# Altium PCB PCB_sendClient.pcbdoc
Units mil, origin at the board's own origin, x right, y up, seen from the top; angles counter-clockwise.
Board outline 3434.79 x 2325.56 mil, 2 copper layers (Top Layer, Bottom Layer); 28 components, 45 nets, 107 pads, 12 vias.
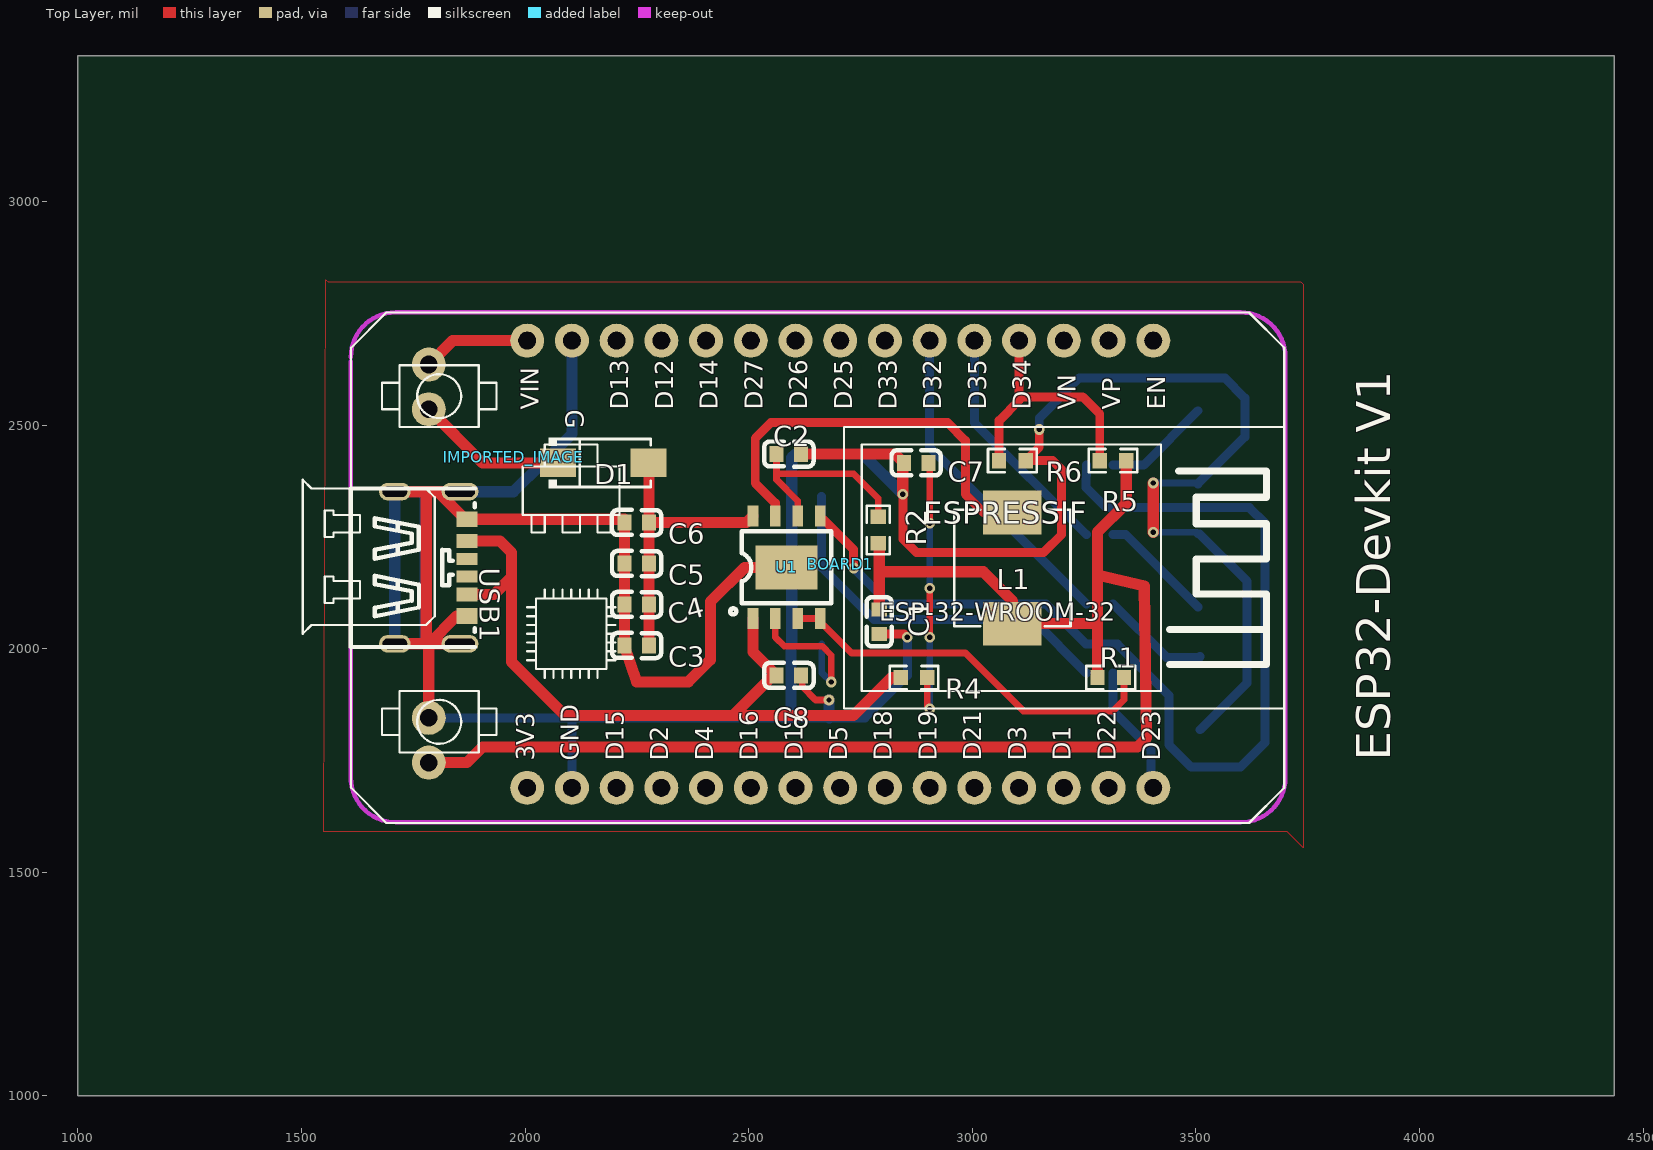
[diagram p0: Top Layer view]
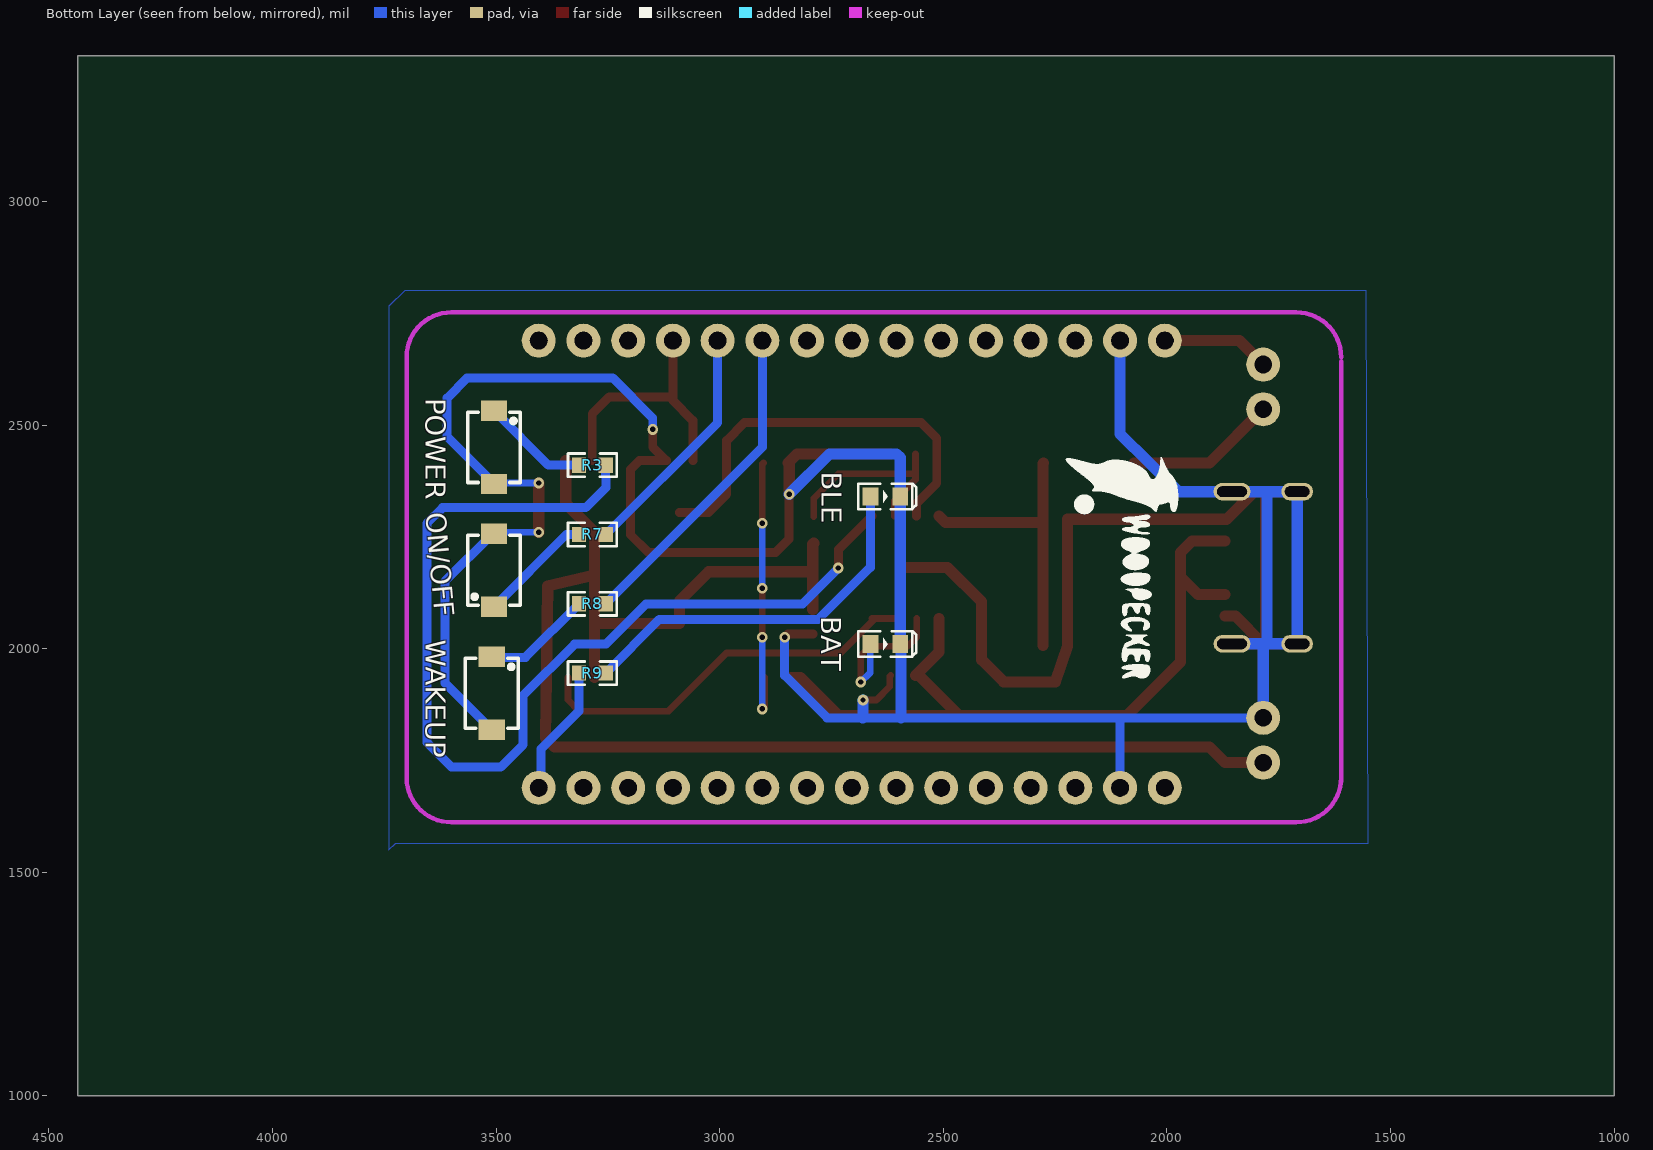
[diagram p1: Bottom Layer view, seen from below]

## Layer stack, top to bottom
Top Layer: signal copper (thickness not stored)
Dielectric: dielectric 12.6, FR-4, Dk 4.8
Bottom Layer: signal copper (thickness not stored)

## Board outline
4434.79,1000 1000,1000 1000,3325.56 4434.79,3325.56

## Components (designator, comment, footprint, x,y, rotation, side; value= is the part's Value field where it differs from the comment)
BAT "LED-0603_R" LED0603_RED 2629.47,2010.56 r0 bottom
BLE "LED-0603_R" LED0603_RED 2629.47,2340.56 r0 bottom
BOARD1 "ESP32DEVKITV1" ESP32-DEVKITV1 2004.47,1689.1 r0 top
C1 "22μF" C0603 2791.63,2060.56 r90 top
C2 "22μF" C0603 2589.47,2435.56 r180 top
C3 "22μF" C0603 2249.47,2007.22 r0 top
C4 "22μF" C0603 2249.47,2098.89 r0 top
C5 "22μF" C0603 2249.47,2190.56 r0 top
C6 "22μF" C0603 2249.47,2282.22 r0 top
C7 "10μF" C0603 2874.47,2415.56 r0 top
C8 "10μF" C0603 2589.47,1940.56 r180 top
D1 "SS14" SMA_L4.4-W2.8-LS5.4-RD 2174.47,2415.56 r0 top
IMPORTED_IMAGE "IMPORTED_IMAGE" IMPORTED_IMAGE 1974.78,2428.51 r0 top
L1 "1uH" IND-SMD_L7.1-W6.6 3089.47,2180.56 r90 top
ON/OFF "BUTTON_FLASH" SMT_SW_PTS_820 3504.47,2175.56 r270 bottom
POWER "BUTTON_FLASH" SMT_SW_PTS_820 3504.47,2450.56 r90 bottom
R1 "1k" R0603#1 3309.47,1935.56 r180 top
R2 "0.5R" R0603#1 2789.47,2265.56 r90 top
R3 "10K" R0603#2 3284.47,2410.56 r180 bottom
R4 "2R" R0603#1 2869.47,1935.56 r0 top
R5 "100k" R0603#1 3314.47,2420.56 r180 top
R6 "100k" R0603#1 3089.47,2420.56 r0 top
R7 "470" R0603#2 3284.47,2255.56 r0 bottom
R8 "470" R0603#2 3284.47,2100.56 r0 bottom
R9 "470" R0603#2 3284.47,1945.56 r180 bottom
U1 "IP5306" ESOP-8_L4.9-W3.9-P1.27-LS6.0-BL-EP 2584.47,2182.09 r0 top
USB1 "KH-TYPE-C-6P" TYPE-C-SMD_TYPE-C-31-M-16 1789.2,2181.23 r270 top
WAKEUP "BUTTON_FLASH" SMT_SW_PTS_820 3509.47,1900.56 r90 bottom

## Footprints (in the part's own frame and the unit in brackets; to place one, negate y for a bottom-side part, rotate by r counter-clockwise, add the part's x,y. Pads: shape width x height; smd on the part's side, far side on the other; paste and mask are expansions set on the pad)
C0603 [mm]
  rect 0.8x0.9 smd: 1(-0.7,0) 2(0.7,0)
  silkscreen extent -1.41,-0.71 1.39,0.72
ESOP-8_L4.9-W3.9-P1.27-LS6.0-BL-EP [mm]
  rect 0.6x1.2 smd: 1(-1.905,-2.908) 2(-0.635,-2.908) 3(0.635,-2.908) 4(1.905,-2.908) 5(1.905,2.908) 6(0.635,2.908) 7(-0.635,2.908) 8(-1.905,2.908)
  rect 3.5x2.5 smd: 9(0,0)
  silkscreen extent -3.2,-2.67 2.55,2.05
ESP32-DEVKITV1 [mil]
  round 76 hole 39.36: 3V3(0,0) D1(1200,0) D2(300,0) D3(1100,0) D4(400,0) D5(700,0) D12(300,1000) D13(200,1000) D14(400,1000) D15(200,0) D16(500,0) D17(600,0) D18(800,0) D19(900,0) D21(1000,0) D22(1300,0) D23(1400,0) D25(700,1000) D26(600,1000) D27(500,1000) D32(900,1000) D33(800,1000) D34(1100,1000) D35(1000,1000) EN(1400,1000) GND(100,1000) GND@1(100,0) VIN(0,1000) VN(1200,1000) VP(1300,1000)
  silkscreen extent -502,-79 1693,1063
IMPORTED_IMAGE [mil]
IND-SMD_L7.1-W6.6 [mm]
  rect 2.474x3.32 smd: 1(3.153,0) 2(-3.153,0)
  silkscreen extent -3.3,-3.3 3.3,3.3
LED0603_RED [mm]
  rect 0.9x1 smd: 1(0.85,0) 2(-0.85,0)
  silkscreen extent -1.75,-0.73 1.54,0.73
R0603#1 [mil]
  rect 31.75x34.02 smd: 1(-29.66,0) 2(29.65,0)
  silkscreen extent -55,-26 55,26
R0603#2 [mil]
  rect 31.75x34.02 smd: 1(29.65,0) 2(-29.66,0)
  silkscreen extent -55,-26 55,26
SMA_L4.4-W2.8-LS5.4-RD [mm]
  rect 2.046x1.62 smd: 1(-2.566,0) 2(2.565,0)
  silkscreen extent -3.08,-1.44 2.7,1.44
SMT_SW_PTS_820 [mil]
  rect 45x59.05 smd: 1(81.69,0) 2(-81.69,0)
  round 0.5 all layers, no hole: MH1(0,-35.43) MH2(0,35.43)
  silkscreen extent -79,-59 79,59
TYPE-C-SMD_TYPE-C-31-M-16 [mm]
  oval 1x2.1 hole 0.6 slot 1.7 at 90 deg: 1(-4.32,1.65) 2(4.32,1.65)
  oval 1x1.8 hole 0.6 slot 1.4 at 90 deg: 3(-4.32,-2.05) 4(4.32,-2.05)
  rect 0.7x1.2 smd: A5(-0.5,2.05) B5(0.5,2.05)
  rect 0.8x1.2 smd: A9(1.52,2.05) B9(-1.52,2.05)
  rect 0.9x1.2 smd: A12(2.75,2.05) B12(-2.75,2.05)
  silkscreen extent -4.5,-4.55 4.5,2.49

## Free pads (board coordinates)
  round 75.98 hole 39.37: ""(1784.47,1745.56) ""(1784.47,1845.56) ""(1784.47,2535.56) ""(1784.47,2635.56)

## Via types
v1: diameter 24, hole 12, Top Layer to Bottom Layer, 12 vias

## Nets (pads, with @x,y where several pads share a name; then routed paths per layer and width w, separated by ;. In a path a pad name is that pad's centre, name@x,y a point inside that pad or via, vN(x,y) a via of type N, cw(c..) or ccw(c..) an arc to the next point about the centre after c; other vN are vias at no path point)
5V: C3.2 C4.2 C5.2 C6.2 D1.2 U1.8 | length 647.4
  Top Layer w25: D1.2 2277.03,2414 C6.2 ; C3.2 C4.2 C5.2 C6.2 ; U1.8 2495.1,2282.22 C6.2
BAT: C1.2 L1.2 pad.@1784.47,1745.56 R1.2 R2.1 R5.1 | length 3301.4
  Top Layer w25: pad.@1784.47,1745.56 1869.47,1745.56 1904.47,1780.56 3369.47,1780.56 3389.47,1800.56 3384.47,2140.56 3279.77,2165.26 ; R2.1 2791.63,2233.73 C1.2 ; 2791.63,2172.05 3024.47,2172.05 3089.47,2107.05 L1.2 3279.81,2056.43 ; R1.2 3279.81,2260.9 3344.13,2325.22 R5.1
BATLEVEL: BOARD1.D34 R5.2 R6.1 | length 587.6
  Top Layer w20: R6.1 3059.77,2510.26 3104.47,2555.56 BOARD1.D34 ; 3104.47,2563.31 3246.72,2563.31 3284.81,2525.22 R5.2
BOARD1_3V3: BOARD1.3V3
BOARD1_D1: BOARD1.D1
BOARD1_D2: BOARD1.D2
BOARD1_D3: BOARD1.D3
BOARD1_D4: BOARD1.D4
BOARD1_D5: BOARD1.D5
BOARD1_D12: BOARD1.D12
BOARD1_D13: BOARD1.D13
BOARD1_D14: BOARD1.D14
BOARD1_D15: BOARD1.D15
BOARD1_D16: BOARD1.D16
BOARD1_D17: BOARD1.D17
BOARD1_D18: BOARD1.D18
BOARD1_D19: BOARD1.D19
BOARD1_D21: BOARD1.D21
BOARD1_D22: BOARD1.D22
BOARD1_D25: BOARD1.D25
BOARD1_D26: BOARD1.D26
BOARD1_D27: BOARD1.D27
BOARD1_D33: BOARD1.D33
BOARD1_EN: BOARD1.EN
BOARD1_VN: BOARD1.VN
BOARD1_VP: BOARD1.VP
GND: BAT.2 BLE.2 BOARD1.GND BOARD1.GND@1 C1.1 C2.1 C3.1 C4.1 C5.1 C6.1 C7.1 C8.1 ON/OFF.2 pad.@1784.47,1845.56 POWER.2 R6.2 U1.9 USB1.1 USB1.2 USB1.3 USB1.4 USB1.A12 USB1.B12 WAKEUP.2 | length 9041.9
  Top Layer w15: C8.1 2619.47,1938.12 2619.47,1915.56 2649.47,1885.56 v1(2679.47,1885.56)
  Top Layer w20: C1.1 2847.03,2033 v1(2854.47,2025.56) ; v1(2844.47,2345.56) 2844.47,2245.56 2874.47,2215.56 3159.47,2215.56 3199.47,2255.56 3199.47,2400.56 3179.47,2420.56 R6.2 3149.47,2450.9 v1(3149.47,2490.56)
  Top Layer w25: USB1.4 USB1.2 ; USB1.3 USB1.1 ; 1778.81,2011.15 1778.81,2351.3 ; pad.@1784.47,1845.56 1784.47,2011.15 1846.28,2072.96 USB1.A12 ; 1804.47,2351.26 1866.27,2289.46 USB1.B12 2221.87,2289.46 C6.1@2221.87,2282.26 ; C3.1@2221.87,2007.26 2249.47,1925.56 2364.47,1925.56 2414.47,1975.56 2414.47,2105.56 2490.97,2182.06 U1.9 ; C3.1 C4.1 C5.1 C6.1 ; C2.1 2826.91,2435.56 C7.1 2844.47,2413.12 v1(2844.47,2345.56) ; v1(3404.47,2260.56) v1(3404.47,2370.56)
  Bottom Layer w15: v1(3404.47,2260.56) 3501.16,2260.56 ON/OFF.2 ; v1(3404.47,2370.56) 3502.78,2370.56 POWER.2
  Bottom Layer w20: pad.@1784.47,1845.56 2099.47,1845.56 ; 2104.47,1689.1 2104.47,1840.56 2099.47,1845.56 ; v1(2854.47,2025.56) 2854.47,1940.56 2759.47,1845.56 2099.47,1845.56 ; v1(3149.47,2490.56) 3149.47,2515.56 3239.47,2605.56 3564.47,2605.56 3609.47,2560.56 3609.47,2473.87 POWER.2 ; ON/OFF.2 3507.78,2257.25 3614.47,2150.56 3614.47,1923.87 WAKEUP.2
  Bottom Layer w25: 1775.9,2011.15 1775.9,2351.3 ; pad.@1784.47,1845.56 1784.47,2011.15 ; USB1.2 USB1.4 USB1.3 USB1.1 ; USB1.1 1973.77,2351.26 2104.47,2480.56 BOARD1.GND ; 2594.57,1845.56 2594.57,2009.11 BAT.2 BLE.2 2596.01,2427.09 2604.47,2435.56 2754.47,2435.56 v1(2844.47,2345.56) ; v1(2679.47,1885.56) 2679.47,1846.17 2680.08,1845.56
K1: BOARD1.D35 R7.2 | length 537.2
  Bottom Layer w20: BOARD1.D35 3004.47,2505.9 R7.2
K1_1: POWER.1 R3.2 | length 240.7
  Bottom Layer w20: R3.2 3382.78,2410.56 POWER.1
K2: BOARD1.D32 R8.2 | length 733.7
  Bottom Layer w20: BOARD1.D32 2904.47,2450.9 R8.2
K2_1: ON/OFF.1 R7.1 | length 257.3
  Bottom Layer w20: R7.1 3342.78,2255.56 ON/OFF.1
LED1: BOARD1.D23 R9.2 | length 293.9
  Bottom Layer w20: R9.2 3314.13,1860.9 3399.47,1775.56 3399.47,1694.1 BOARD1.D23
R4_2: C7.2 R4.2 | length 623.2
  Top Layer w15: R4.2 2899.13,1870.9 v1(2904.47,1865.56) ; C7.2 2904.47,2413.11 v1(2904.47,2280.56) ; v1(2904.47,2025.56) v1(2904.47,2135.56)
  Bottom Layer w15: v1(2904.47,1865.56) v1(2904.47,2025.56) ; v1(2904.47,2135.56) v1(2904.47,2280.56)
R8_1: R8.1 WAKEUP.1 | length 245.6
  Bottom Layer w20: R8.1@3314.17,2100.56 3434.47,1980.56 3507.77,1980.56 WAKEUP.1@3509.47,1982.26
R9_1: BLE.1 R9.1 | length 848.3
  Bottom Layer w20: BLE.1@2662.97,2340.56 2662.97,2182.06 2779.47,2065.56 3134.77,2065.56 R9.1
TEST_N: D1.1 pad.@1784.47,2535.56 | length 338.7
  Top Layer w25: pad.@1784.47,2535.56 1904.47,2415.56 D1.1
TEST_P: BOARD1.VIN pad.@1784.47,2635.56 | length 242.2
  Top Layer w25: pad.@1784.47,2635.56 1838.02,2689.1 BOARD1.VIN
U1_2: BAT.1 U1.2 | length 337.5
  Top Layer w15: U1.2 2559.47,2025.56 2579.47,2005.56 2664.47,2005.56 2684.47,1985.56 v1(2684.47,1925.56)
  Bottom Layer w15: BAT.1@2662.97,2010.56 2662.97,1947.06 v1(2684.47,1925.56)
U1_3: R1.1 U1.3 U1.4 | length 903.3
  Top Layer w15: U1.3 U1.4 ; 2631.97,2067.56 2652.47,2067.56 2729.47,1990.56 2984.47,1990.56 3114.47,1860.56 3314.47,1860.56 3339.17,1885.86 R1.1@3339.17,1935.56
U1_5: R3.1 U1.5 | length 2311.8
  Top Layer w20: U1.5 2734.47,2221.59 v1(2734.47,2180.56)
  Bottom Layer w20: v1(2734.47,2180.56) 2814.47,2100.56 3164.47,2100.56 3254.47,2010.56 3324.47,2010.56 3439.47,1895.56 3439.47,1785.56 3489.47,1735.56 3599.47,1735.56 3654.47,1790.56 3654.47,2280.56 3619.47,2315.56 3299.47,2315.56 3254.47,2360.56 R3.1
U1_6: C2.2 R2.2 U1.6 | length 450.1
  Top Layer w15: 2561.91,2391.35 2734.47,2391.35 2789.47,2336.35 R2.2 ; C2.2 2561.91,2378.12 2609.47,2330.56 U1.6
U1_7: L1.1 U1.7 | length 935.6
  Top Layer w20: U1.7 2559.47,2325.56 2514.47,2370.56 2514.47,2470.56 2549.47,2505.56 2944.47,2505.56 2984.47,2465.56 2984.47,2345.56 3025.34,2304.69 L1.1
USB1_A5: USB1.A5
USB1_B5: USB1.B5
VIN: C8.2 R4.1 U1.1 USB1.A9 USB1.B9 | length 1729.8
  Top Layer w25: USB1.A9 1930.3,2121.38 1969.47,2160.56 1969.47,2215.56 1943.95,2241.07 USB1.B9 ; 1969.47,2180.76 1969.47,1970.56 2089.47,1850.56 2464.47,1850.56 ; U1.1 2509.47,1993 C8.2 ; C8.2 2554.47,1940.56 2464.47,1850.56 ; R4.1 2819.47,1935.56 2734.47,1850.56 2479.47,1850.56 2464.47,1850.56
pads on no net: ON/OFF.MH1 ON/OFF.MH2 POWER.MH1 POWER.MH2 WAKEUP.MH1 WAKEUP.MH2

## Polygon pours and split planes (outlines as drawn)
GND on Bottom Layer (solid): 1554.47,2800.56 3704.47,2800.56 3739.47,2765.56 3739.47,1550.56 3724.47,1565.56 1549.47,1565.56
GND on Top Layer (solid): 1554.47,2825.56 1559.47,2820.56 3734.47,2820.56 3739.47,2815.56 3739.47,1555.56 3704.47,1590.56 1549.47,1590.56

## Keep-outs
Keep-Out Layer:
  lines w10: 1610.06,1712.09 ccw(c1710.06,1712.09) 1710.06,1612.09 ; 1610.06,2652.09 cw(c1710.06,2652.09) 1710.06,2752.09 ; 3600.06,1612.09 ccw(c3600.06,1712.09) 3700.06,1712.09 ; 3600.06,2752.09 cw(c3600.06,2652.09) 3700.06,2652.09

## Text inside footprints (layer, text, board x,y; h text height)
BOARD1: Top Overlay "3V3" at 2020.22,1749.73 h40 r90; Top Overlay "GND" at 2120.22,1749.73 h40 r90; Top Overlay "D15" at 2220.22,1749.73 h40 r90; Top Overlay "D2" at 2320.22,1749.73 h40 r90; Top Overlay "D4" at 2420.22,1749.73 h40 r90; Top Overlay "D16" at 2520.22,1749.73 h40 r90; Top Overlay "D17" at 2620.22,1749.73 h40 r90; Top Overlay "D5" at 2720.22,1749.73 h40 r90; Top Overlay "D18" at 2820.22,1749.73 h40 r90; Top Overlay "D19" at 2920.22,1749.73 h40 r90; Top Overlay "D21" at 3020.22,1749.73 h40 r90; Top Overlay "D3" at 3120.22,1749.73 h40 r90; Top Overlay "D1" at 3220.22,1749.73 h40 r90; Top Overlay "D22" at 3320.22,1749.73 h40 r90; Top Overlay "D23" at 3420.22,1749.73 h40 r90; Top Overlay "VIN" at 2030.85,2534.37 h40 r90; Top Overlay "G" at 2090.85,2534.37 h40 r270; Top Overlay "D13" at 2230.85,2534.37 h40 r90; Top Overlay "D12" at 2330.85,2534.37 h40 r90; Top Overlay "D14" at 2430.85,2534.37 h40 r90; Top Overlay "D27" at 2530.85,2534.37 h40 r90; Top Overlay "D26" at 2630.85,2534.37 h40 r90; Top Overlay "D25" at 2730.85,2534.37 h40 r90; Top Overlay "D33" at 2830.85,2534.37 h40 r90; Top Overlay "D32" at 2930.85,2534.37 h40 r90; Top Overlay "D35" at 3030.85,2534.37 h40 r90; Top Overlay "D34" at 3130.85,2534.37 h40 r90; Top Overlay "VN" at 3230.85,2534.37 h40 r90; Top Overlay "VP" at 3330.85,2534.37 h40 r90; Top Overlay "EN" at 3430.85,2534.37 h40 r90; Top Overlay "ESPRESSIF" at 2890.29,2279.65 h50; Top Overlay "ESP-32-WROOM-32" at 2791.87,2063.11 h40; Top Overlay "ESP32-Devkit V1" at 3934.79,1749.1 h76 r90